# EAGLE board kingoftone_v2 (EAGLE 6.5.0)
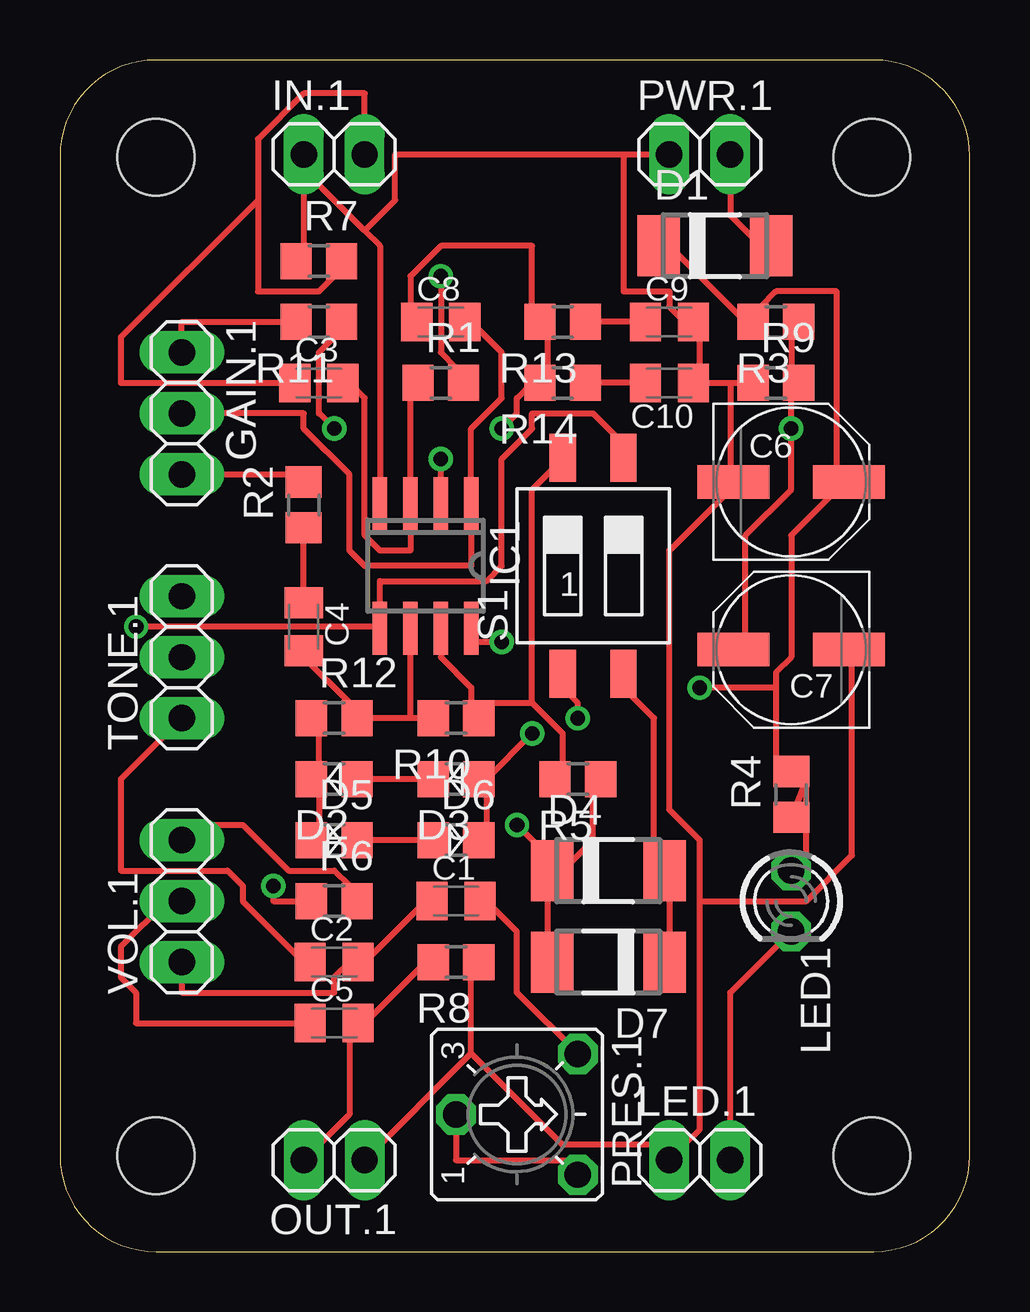
[diagram p0: board, top side]
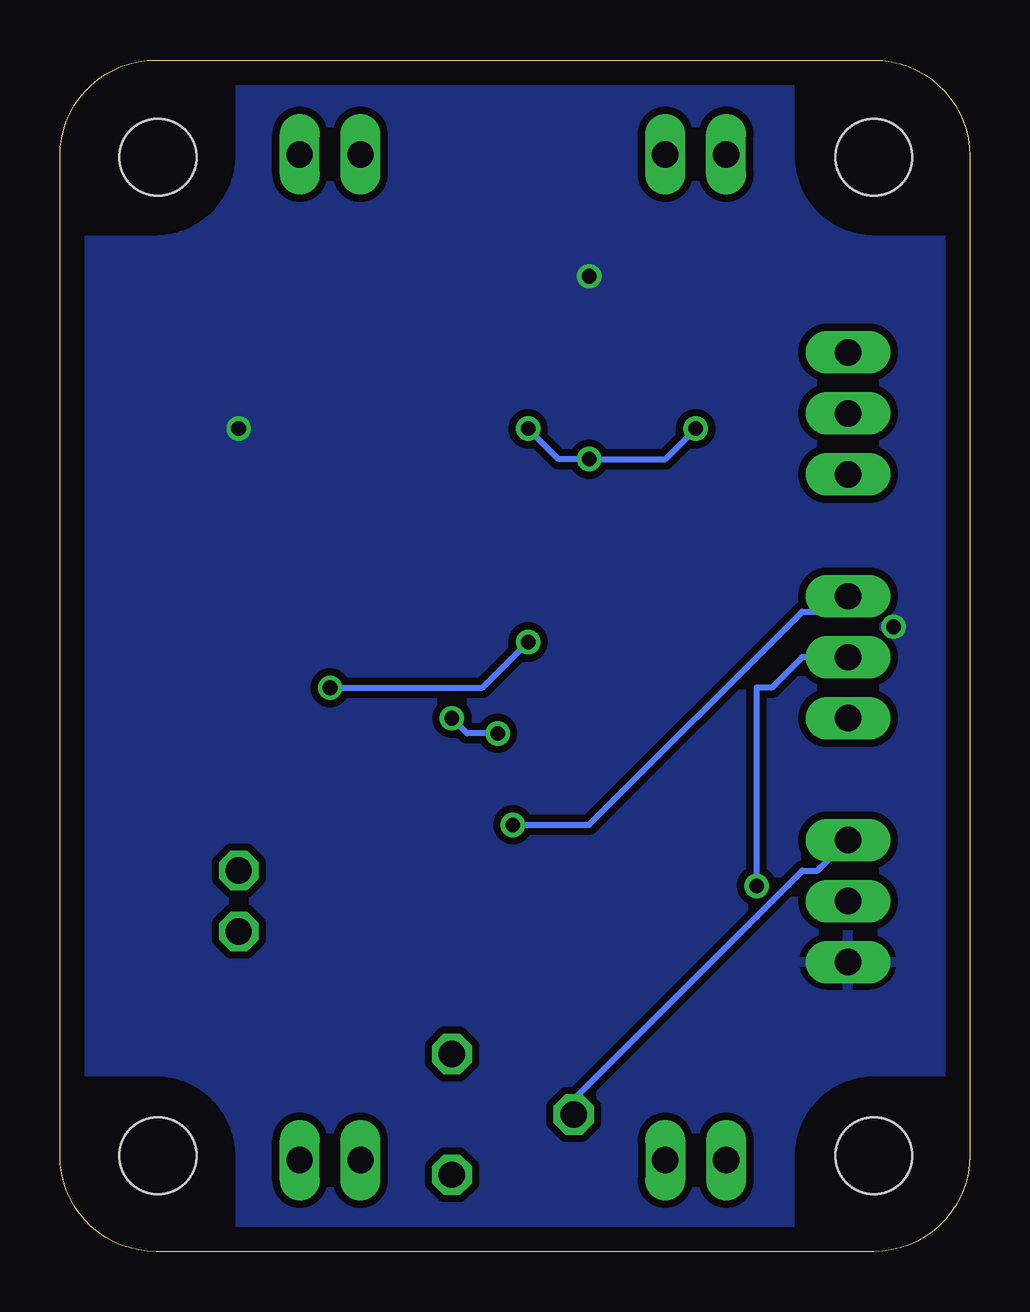
[diagram p1: board, bottom side, seen from below]

Size 37.93 x 49.65 mm. Coordinates in mm from the lower left corner, seen from the top.
Outline: 4,0 33.93,0 arc90 37.93,4 37.93,45.65 arc90 33.93,49.65 4,49.65 arc90 0,45.65 0,4 arc90 4,0
Copper layers (1*16): Top 0.035mm / dielectric 1.5mm / Bottom 0.035mm
Design rules "default": minimum track width 10mil, minimum drill 24mil, track to track 8mil, track to pad 8mil, pad to pad 8mil, via to via 8mil, smd to smd 8mil, copper to edge 40mil, drill to drill 8mil, minimum pad ring 10mil, minimum via ring 8mil, stop-mask expansion 4mil, vias tented up to drill 0mil, thermal gap 10mil
Holes 3.2 mm at 4,4 33.84,4 33.84,45.59 4,45.59
tKeepout: 8 lines
tRestrict: area 0,42.6 to 7,49.6; area 30.9,42.6 to 37.9,49.6; area 0,0 to 7,7; area 30.9,0 to 37.9,7
bRestrict: area 0,42.6 to 7,49.6; area 30.9,42.6 to 37.9,49.6; area 0,0 to 7,7; area 30.9,0 to 37.9,7
vRestrict: area 0,42.6 to 7,49.6; area 30.9,42.6 to 37.9,49.6; area 0,0 to 7,7; area 30.9,0 to 37.9,7

## Footprints (pad centres in the part's own frame; a part is rotated, then mirrored left to right if it is on the bottom)
C0805K = smd 1.3 x 1.6: 1 -1,0; 2 1,0
PANASONIC_D = smd 3 x 1.4: + 2.4,0; - -2.4,0
DO-214AC = smd 1.778 x 2.54: A 2.342,0; C -2.342,0
D0805 = smd 1.3 x 1.5: A -0.95,0; K 0.95,0
1X03 = drill 1.1 pad 1.778 long: 1 -2.54,0; 2 0,0; 3 2.54,0
SO08 = smd 0.6 x 2.2: 1 -1.905,-2.6; 2 -0.635,-2.6; 3 0.635,-2.6; 4 1.905,-2.6; 5 1.905,2.6; 6 0.635,2.6; 7 -0.635,2.6; 8 -1.905,2.6
1X02 = drill 1.1 pad 1.676 long: 1 -1.27,0; 2 1.27,0
LED3MM = drill 1.1 octagon: A -1.27,0; K 1.27,0
CT6 = drill 1.1 pad 1.676 octagon: A 2.515,2.54; E -2.515,2.54; S 0,-2.54
R0805 = smd 1.3 x 1.5: 1 -0.95,0; 2 0.95,0
SMS-002 = smd 1.092 x 2.007: 1 -1.27,-4.496; 2 1.27,-4.496; 3 1.27,4.496; 4 -1.27,4.496

## Placement (x,y rotation side)
C1  10nF  [C0805K]  16.51,14.61 0 top
C2  10nF  [C0805K]  11.43,12.06 0 top
C3  10nF  [C0805K]  10.79,36.2 0 top
C4  100nF  [C0805K]  10.16,26.04 270 top
C5  1uF  [C0805K]  11.43,9.53 0 top
C6  100uF  [PANASONIC_D]  30.48,32.07 0 top
C7  100uF  [PANASONIC_D]  30.48,25.08 180 top
C8  100pF  [C0805K]  15.88,38.73 0 top
C9  10nF  [C0805K]  25.4,38.73 0 top
C10  10nF  [C0805K]  25.4,36.2 180 top
D1  ES1  [DO-214AC]  27.3,41.91 0 top
D2  1N4148  [D0805]  11.43,19.68 180 top
D3  1N4148  [D0805]  16.51,19.68 180 top
D4  S1M  [DO-214AC]  22.86,15.88 0 top
D5  1N4148  [D0805]  11.43,17.14 0 top
D6  1N4148  [D0805]  16.51,17.14 0 top
D7  S1M  [DO-214AC]  22.86,12.06 180 top
GAIN.1  100kB  [1X03]  5.08,34.92 270 top
IC1  NE5535U  [SO08]  15.24,28.57 180 top
IN.1  [1X02]  11.43,45.72 0 top
LED1  [LED3MM]  30.48,14.61 270 top
LED.1  [1X02]  26.67,3.81 0 top
OUT.1  [1X02]  11.43,3.81 180 top
PRES.1  50k  [CT6]  19.05,5.71 270 top
PWR.1  [1X02]  26.67,45.72 0 top
R1  1M  [R0805]  15.88,36.2 0 top
R2  10k  [R0805]  10.16,31.11 90 top
R3  47k  [R0805]  29.84,38.73 180 top
R4  1k  [R0805]  30.48,19.05 90 top
R5  1k  [R0805]  21.59,19.68 180 top
R6  6k8  [R0805]  11.43,14.61 0 top
R7  1M  [R0805]  10.79,41.27 0 top
R8  1M  [R0805]  16.51,12.06 180 top
R9  47k  [R0805]  29.84,36.2 0 top
R10  220k  [R0805]  16.51,22.23 180 top
R11  10k  [R0805]  10.79,38.73 180 top
R12  6k8  [R0805]  11.43,22.23 0 top
R13  27k  [R0805]  20.95,38.73 180 top
R14  33k  [R0805]  20.95,36.2 180 top
S1  SWS002  [SMS-002]  22.23,28.57 0 top
TONE.1  25kB  [1X03]  5.08,24.77 90 top
VOL.1  100kA  [1X03]  5.08,14.61 90 top

## Library data of the parts
C1-C10 D1-D7 GAIN.1 IC1 IN.1 LED1 LED.1 OUT.1 PRES.1 PWR.1 R1-R14 S1 TONE.1 VOL.1 = kingoftone

## Nets
+4.5V: C1.1 C2.2 C7.+ IC1.5 R1.2 R3.1 R9.2 S1.3 VOL.1.1
+9V: C6.+ D1.C IC1.8 R3.2 R4.2
GND: C6.- C7.- C9.2 C10.1 IC1.4 IN.1.1 LED.1.1 OUT.1.1 PWR.1.1 R7.1 R8.1 R9.1
N$1: C3.1 IN.1.2 R7.2
N$2: C3.2 IC1.3 R1.1
N$3: C8.1 IC1.2 R11.1 R13.2 R14.2
N$4: C8.2 GAIN.1.2 IC1.1
N$5: C9.1 R13.1
N$6: C10.2 R14.1
N$7: GAIN.1.1 R11.2
N$8: C4.1 R2.1
N$9: GAIN.1.3 R2.2
N$10: C4.2 IC1.6 R10.2 R12.2
N$11: IC1.7 R5.2 R10.1 S1.4
N$12: D2.A D3.K
N$13: D2.K D5.A R12.1
N$14: D5.K D6.A
N$15: D3.A D6.K S1.1
N$16: D4.C D7.A R5.1 TONE.1.3
N$17: D4.A D7.C S1.2
N$18: C5.1 VOL.1.2
N$19: R6.1 TONE.1.2
N$20: C2.1 TONE.1.1
N$21: C1.2 PRES.1.E
N$22: PRES.1.A PRES.1.S R6.2 VOL.1.3
N$23: C5.2 OUT.1.2 R8.2
N$24: D1.A PWR.1.2
N$25: LED1.A R4.1
N$26: LED1.K LED.1.2

## Tracks (layer width: path | path; a pad name or v marks a point on that pad's centre or on a via)
+4.5V  (via drill 0.61)
  Top 0.254: 30.48,36.2 30.48,38.73 R3.1 | 30.48,36.2 v30.48,34.29 30.48,31.75 28.57,29.84 28.57,25.4 C7.+ | 30.48,36.2 R9.2 | C1.1 15.24,14.61 12.7,12.06 C2.2 12.06,12.06 11.43,11.43 11.43,10.79 5.08,10.79 VOL.1.1 | v15.88,40.64 15.88,37.47 16.51,36.83 16.51,36.2 R1.2 | 13.34,26.04 13.34,27.94 17.78,27.94 18.41,28.57 18.41,33.02 19.68,34.29 19.68,34.92 22.23,34.92 23.5,33.66 S1.3 | 13.34,26.04 v3.17,26.04 | 13.34,26.04 IC1.5
  pour Bottom (isolate 0.305): -1.27,50.8 -1.27,-1.27 39.37,-1.27 39.37,50.8
+9V  (via drill 0.61)
  Top 0.254: D1.C 25.4,41.91 28.57,38.73 R3.2 29.21,38.73 29.21,39.37 29.84,40.01 32.38,40.01 32.38,32.38 C6.+ 32.38,31.75 30.48,29.84 30.48,24.77 29.84,24.13 29.84,23.5 | 29.84,23.5 29.84,19.68 R4.2 | v18.41,25.4 17.14,25.4 IC1.8 | 29.84,23.5 v26.67,23.5
  Bottom 0.254: v18.41,25.4 20.32,23.5 v26.67,23.5
GND
  Top 0.254: 26.67,36.2 27.94,36.2 | 27.94,36.2 R9.1 | 26.67,36.2 26.67,38.73 C9.2 26.04,38.73 25.4,39.37 25.4,40.01 23.5,40.01 23.5,45.72 | 26.67,36.2 C10.1 | 27.94,36.2 27.94,32.38 C6.- 27.94,31.75 25.4,29.21 25.4,18.41 26.67,17.14 26.67,14.61 | 10.16,45.09 10.16,41.27 R7.1 | IC1.4 13.34,41.91 12.7,42.55 | 10.16,45.09 12.7,42.55 | 10.16,45.09 IN.1.1 | 23.5,45.72 13.97,45.72 13.97,43.81 12.7,42.55 | 23.5,45.72 PWR.1.1 | 17.14,8.26 17.14,12.06 R8.1 | OUT.1.1 17.14,8.26 | 26.67,14.61 31.11,14.61 33.02,16.51 33.02,24.77 C7.- | 26.67,14.61 26.67,5.08 26.04,4.45 | 17.14,8.26 20.95,4.45 26.04,4.45 | 26.04,4.45 LED.1.1
N$1
  Top 0.254: 8.26,43.81 8.26,46.35 10.16,48.26 12.7,48.26 IN.1.2 | 8.26,43.81 8.26,40.01 10.79,40.01 11.43,40.64 11.43,41.27 R7.2 | C3.1 2.54,36.2 2.54,38.1 8.26,43.81
N$2
  Top 0.254: R1.1 14.61,36.2 IC1.3 14.61,29.21 13.34,29.21 12.7,29.84 12.7,35.56 12.06,36.2 C3.2
N$3  (via drill 0.61)
  Top 0.254: C8.1 14.61,38.73 14.61,40.64 15.88,41.91 19.68,41.91 19.68,38.73 R13.2 20.32,38.73 20.32,36.2 R14.2 19.68,36.2 19.05,35.56 19.05,34.92 v18.41,34.29 | v11.43,34.29 10.79,34.92 10.79,37.47 11.43,38.1 11.43,38.73 R11.1 | IC1.2 v15.88,33.02
  Bottom 0.254: v11.43,34.29 12.7,33.02 v15.88,33.02 17.14,33.02 v18.41,34.29
N$4
  Top 0.254: C8.2 17.14,38.73 18.41,37.47 18.41,35.56 17.14,34.29 IC1.1 17.14,28.57 12.7,28.57 12.06,29.21 12.06,32.38 10.16,34.29 10.16,34.92 GAIN.1.2
N$5
  Top 0.254: C9.1 R13.1
N$6
  Top 0.254: C10.2 R14.1
N$7
  Top 0.254: R11.2 5.08,38.73 GAIN.1.1
N$8
  Top 0.254: C4.1 R2.1
N$9
  Top 0.254: GAIN.1.3 10.16,32.38 R2.2
N$10
  Top 0.254: R10.2 14.61,22.23 | 14.61,22.23 R12.2 12.06,22.23 12.06,22.86 10.16,24.77 C4.2 | 14.61,22.23 IC1.6
N$11
  Top 0.254: 17.14,22.86 17.14,23.5 15.88,24.77 IC1.7 | 17.14,22.86 17.14,22.23 R10.1 17.14,22.86 | 19.68,22.86 20.95,21.59 20.95,19.68 R5.2 | 17.14,22.86 19.68,22.86 | 19.68,22.86 19.68,31.75 20.95,33.02 S1.4
N$12
  Top 0.254: D3.K D2.A
N$13
  Top 0.254: 10.79,19.68 10.79,17.14 D5.A | 10.79,19.68 10.79,22.23 R12.1 | 10.79,19.68 D2.K
N$14
  Top 0.254: D6.A D5.K
N$15  (via drill 0.61)
  Top 0.254: 17.78,19.68 17.78,17.14 D6.K | v21.59,22.23 21.59,22.86 20.95,23.5 S1.1 | 17.78,19.68 v19.68,21.59 | 17.78,19.68 D3.A
  Bottom 0.254: v21.59,22.23 20.95,21.59 v19.68,21.59
N$16  (via drill 0.61)
  Top 0.254: R5.1 22.23,19.68 22.23,17.14 20.95,15.88 D4.C 20.32,15.88 | 20.32,15.88 20.32,12.06 D7.A | v19.05,17.78 20.32,16.51 20.32,15.88
  Bottom 0.254: TONE.1.3 5.71,26.67 6.99,26.67 15.88,17.78 v19.05,17.78
N$17
  Top 0.254: S1.2 23.5,23.5 24.77,22.23 24.77,15.88 D4.A 25.4,15.88 25.4,12.06 D7.C
N$18
  Top 0.254: C5.1 3.17,9.53 3.17,10.79 2.54,11.43 2.54,12.7 4.45,14.61 VOL.1.2
N$19  (via drill 0.61)
  Top 0.254: R6.1 8.89,14.61 v8.89,15.24
  Bottom 0.254: v8.89,15.24 8.89,23.5 8.26,23.5 6.99,24.77 TONE.1.2
N$20
  Top 0.254: TONE.1.1 2.54,19.68 2.54,15.88 6.99,15.88 7.62,15.24 7.62,14.61 10.16,12.06 C2.1
N$21
  Top 0.254: C1.2 17.78,14.61 19.05,13.34 19.05,10.79 21.59,8.26 PRES.1.E
N$22
  Top 0.254: VOL.1.3 5.08,17.78 7.62,17.78 9.53,15.88 11.43,15.88 12.06,15.24 12.06,14.61 R6.2 | PRES.1.S 16.51,3.81 21.59,3.81 PRES.1.A
  Bottom 0.254: VOL.1.3 6.35,15.88 6.99,15.88 16.51,6.35 PRES.1.S
N$23
  Top 0.254: R8.2 15.24,12.06 12.7,9.53 C5.2 12.06,9.53 12.06,5.71 OUT.1.2
N$24
  Top 0.254: PWR.1.2 27.94,43.18 29.21,41.91 D1.A
N$25
  Top 0.254: LED1.A 31.11,16.51 31.11,19.68 R4.1
N$26
  Top 0.254: LED1.K 27.94,10.79 LED.1.2